# Altium PCB BLDC_PCB.PcbDoc
Units mil, origin at the board's own origin, x right, y up, seen from the top; angles counter-clockwise.
Board outline 6000 x 4000 mil, 2 copper layers (Top Layer, Bottom Layer); 56 components, 25 nets, 275 pads, 0 vias.
Unrouted connection lines stored in the file: 58.
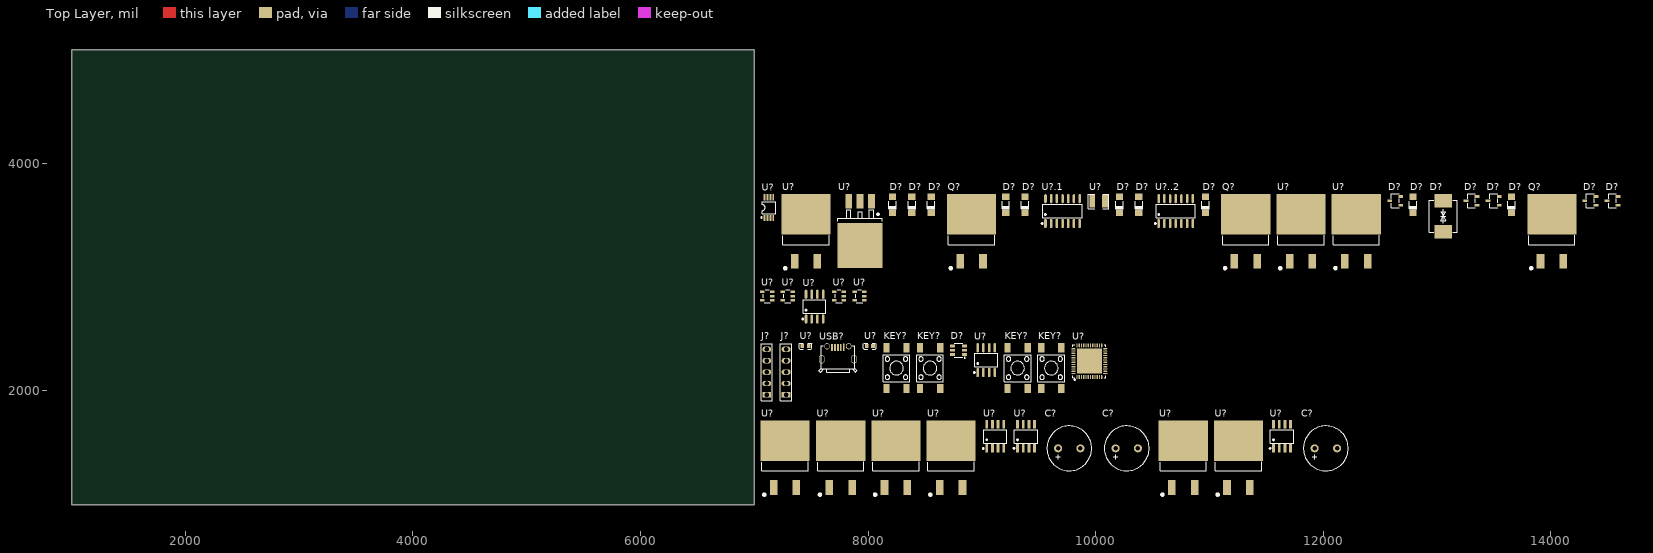
[diagram p0: Top Layer view]
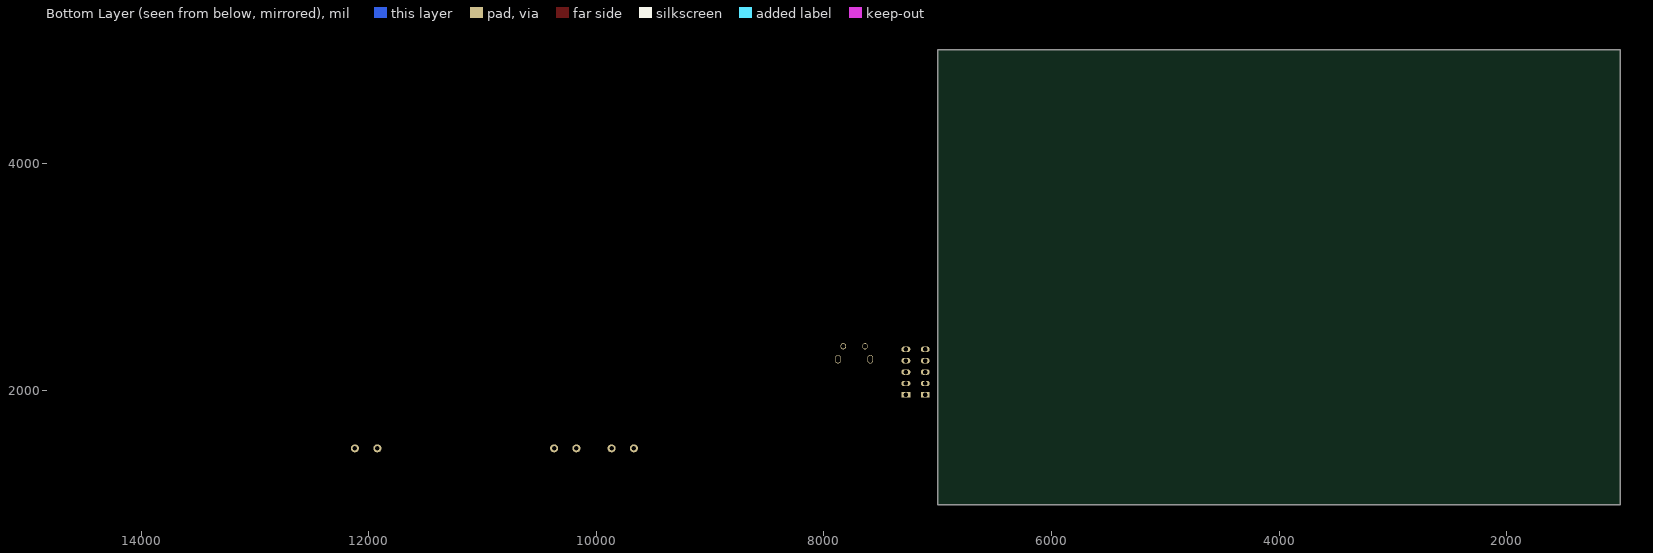
[diagram p1: Bottom Layer view, seen from below]

## Layer stack, top to bottom
Top Solder: solder mask 0.4, Solder Resist, Dk 3.5
Top Layer: signal copper 1.4
Dielectric 1: dielectric 12.6, FR-4, Dk 4.8
Bottom Layer: signal copper 1.4
Bottom Solder: solder mask 0.4, Solder Resist, Dk 3.5

## Board outline
1000,1000 7000,1000 7000,5000 1000,5000

## Design rules (kind name [scope] priority, off if disabled: settings)
Clearance [All] p1: gap=10 ignorepadtopadclearanceinfootprint=FALSE except(0: Arc-Hole Track-Hole SMDPad-Hole THPad-Hole Via-Hole Fill-Hole Poly-Hole Region-Hole Text-Hole)
PolygonConnect [All] p1: connectstyle=Relief reliefconductorwidth=10 reliefentries=4 polygonreliefangle="90 Angle" airgapwidth=10
RoomDefinition PROTECTION [InComponentClass('PROTECTION')] p1: confinementstyle=ConfineIn formatcopy=TRUE lockcomponents=FALSE outline 7045,1060 14625,1060 14625,3840 7045,3840
RoomDefinition POWER [InComponentClass('POWER')] p2: confinementstyle=ConfineIn formatcopy=TRUE lockcomponents=FALSE outline 7045,1060 14625,1060 14625,3840 7045,3840
RoomDefinition MCU [InComponentClass('MCU')] p3: confinementstyle=ConfineIn formatcopy=TRUE lockcomponents=FALSE outline 7045,1060 14625,1060 14625,3840 7045,3840
RoomDefinition DRIVER [InComponentClass('DRIVER')] p4: confinementstyle=ConfineIn formatcopy=TRUE lockcomponents=FALSE outline 7045,1060 14625,1060 14625,3840 7045,3840
RoutingVias [All] p1: holewidth=28 width=50 viastyle="Through Hole" minholewidth=28 minwidth=50 maxholewidth=28 maxwidth=50
SolderMaskExpansion [All] p1: expansion=4
Width [All] p1: maxlimit=10 minlimit=10 preferedwidth=10
30 further rules are at their usual default settings.

## Classes and differential pairs
component class PROTECTION: C? D? Q? R? U? U?.1 U?..2
component class POWER: C? D? L? R? U?
component class MCU: C? D? J? KEY? R? U? USB? Y?
component class DRIVER: C? D? R? U?

## Components (designator, comment, footprint, x,y, rotation, side; value= is the part's Value field where it differs from the comment)
C? "35V 1000uF" "35V 1000uF" 9670,1495 r0 top
C? "35V 1000uF" "35V 1000uF" 10175,1495 r0 top
C? "35V 1000uF" "35V 1000uF" 11925,1495 r0 top
D? "SESRV05-4" SOT-23-6_L2.9-W1.6-P0.95-LS2.8-BR 8795,2355 r0 top
D? "BAT54C" SOT-23-3_L2.9-W1.6-P1.90-LS2.8-BR 12630,3670 r0 top
D? "BAT54C" SOT-23-3_L2.9-W1.6-P1.90-LS2.8-BR 13495,3670 r0 top
D? "BAT54C" SOT-23-3_L2.9-W1.6-P1.90-LS2.8-BR 14540,3670 r0 top
D? "BAT54C" SOT-23-3_L2.9-W1.6-P1.90-LS2.8-BR 13300,3670 r0 top
D? "BAT54C" SOT-23-3_L2.9-W1.6-P1.90-LS2.8-BR 14345,3670 r0 top
D? "BZV55C2V7" SOD-80_L3.5-W1.5-RD 8385,3635 r90 top
D? "BZV55C5V1" SOD-80_L3.5-W1.5-RD 9210,3635 r90 top
D? "BZV55C15" SOD-80_L3.5-W1.5-RD 12790,3635 r90 top
D? "BZV55C15" SOD-80_L3.5-W1.5-RD 13655,3635 r90 top
D? "BZV55C15" SOD-80_L3.5-W1.5-RD 10380,3635 r90 top
D? "BZV55C15" SOD-80_L3.5-W1.5-RD 10210,3635 r90 top
D? "BZV55C15" SOD-80_L3.5-W1.5-RD 9380,3635 r90 top
D? "BZV55C15" SOD-80_L3.5-W1.5-RD 10965,3635 r90 top
D? "BZV55C8V2" SOD-80_L3.5-W1.5-RD 8215,3635 r90 top
D? "BZV55C15" SOD-80_L3.5-W1.5-RD 8555,3635 r90 top
D? "SMCJ24CA-C140805" SMC_L6.9-W5.9-LS7.9-BI 13055,3535 r90 top
J? "HEADER 1X5" 1X5-PIN-HEADER-2.54MM_ES 7280,2165 r90 top
J? "HEADER 1X5" 1X5-PIN-HEADER-2.54MM_ES 7110,2165 r90 top
KEY? "4PINTACTPCBTHTPUSHBUTTON" SW-SMD_4P-L6.0-W6.0-P4.50-LS10.0_TL3301EF160QG 8250,2200 r90 top
KEY? "4PINTACTPCBTHTPUSHBUTTON" SW-SMD_4P-L6.0-W6.0-P4.50-LS10.0_TL3301EF160QG 8545,2200 r90 top
KEY? "4PINTACTPCBTHTPUSHBUTTON" SW-SMD_4P-L6.0-W6.0-P4.50-LS10.0_TL3301EF160QG 9315,2200 r90 top
KEY? "4PINTACTPCBTHTPUSHBUTTON" SW-SMD_4P-L6.0-W6.0-P4.50-LS10.0_TL3301EF160QG 9610,2200 r90 top
Q? "IRF4905" IRF4905 11220,3140 r0 top
Q? "IRF4905" IRF4905 8810,3140 r0 top
Q? "IRF4905" IRF4905 13910,3140 r0 top
U? "IRF3205S" IRF4905 7660,1150 r0 top
U? "IRF3205S" IRF4905 8630,1150 r0 top
U? "IR2103SPBF-IR" SOIC-8_IR2103 9385,1600 r0 top
U? "IRF3205S" IRF4905 7170,1150 r0 top
U? "IRF3205S" IRF4905 8145,1150 r0 top
U? "IR2103SPBF-IR" SOIC-8_IR2103 9115,1600 r0 top
U? "IRF3205S" IRF4905 10670,1150 r0 top
U? "IRF3205S" IRF4905 11155,1150 r0 top
U? "IR2103SPBF-IR" SOIC-8_IR2103 11635,1600 r0 top
U? "100@100MHZ-0603" L0603 8035,2390 r0 top
U? "M24C64-RMN6P" SOIC-8_L4.9-W3.8-P1.27-LS6.0-BL 9035,2270 r0 top
U? "100@100MHZ-0603" L0603 7470,2390 r0 top
U? "STM32F103C8T6" UFQFPN-48_STM32 9945,2255 r0 top
U? "OPA170DBV" SOT-23-5_L2.9-W1.6-P0.95-LS2.8-BR 7115,2830 r0 top
U? "INA180B1IDBVR" SOT-23-5_L2.9-W1.6-P0.95-LS2.8-BR 7925,2830 r0 top
U? "INA180B1IDBVR" SOT-23-5_L2.9-W1.6-P0.95-LS2.8-BR 7295,2830 r0 top
U? "INA180B1IDBVR" SOT-23-5_L2.9-W1.6-P0.95-LS2.8-BR 7745,2830 r0 top
U? "TPS54331DR-YJLTY" SOIC-8_TPS54331 7555,2700 r0 top
U? "MCP6002-XSN" MSOP-8_MCP6002-XSN 7125,3610 r0 top
U? "IRF3205S" IRF4905 11705,3140 r0 top
U? "NTC/10K" R1210 9970,3670 r0 top
U? "IRF3205S" IRF4905 12190,3140 r0 top
U? "IRF3205S" IRF4905 7355,3140 r0 top
U? "LM7809S/TR" TO-263-3_LM7809 7930,3405 r90 top
U?.1 "OPA4170AIDR" SOIC-14_OPA4170 9705,3580 r0 top
U?..2 "OPA4170AIDR _2" SOIC-14_OPA4170 10700,3580 r0 top
USB? "U254-051T-4BHJ25-F2S" MICRO-USB-SMD_U254-051T-4BHJ25-F2S 7735,2290 r0 top

## Footprints (in the part's own frame and the unit in brackets; to place one, negate y for a bottom-side part, rotate by r counter-clockwise, add the part's x,y. Pads: shape width x height; smd on the part's side, far side on the other; paste and mask are expansions set on the pad)
1X5-PIN-HEADER-2.54MM_ES [mm]
  rect 1.2x2 hole 0.9 slot 0.9 at 90 deg paste+0 mask+0.102: 1(-5.08,0)
  oval 1.2x2 hole 0.9 slot 0.9 at 90 deg paste+0 mask+0.102: 2(-2.54,0) 3(0,0) 4(2.54,0) 5(5.08,0)
  silkscreen extent -6.35,-1.27 6.35,1.27
"35V 1000uF" [mm]
  round 1.8 hole 1: 1(0,0) 2(5,0)
  silkscreen extent -2.5,-5 7.5,5, body extent -2.5,-5 7.5,5, height 20
IRF4905 [mm]
  rect 1.7x3.3 smd paste+0 mask+0.051: 1(0,0) 3(5.08,0)
  rect 11x9 smd paste+0 mask+0.051: 2(2.54,10.472)
  silkscreen extent -2.62,-1.81 7.7,5.78, body extent -2.32,-1.18 7.33,14.7, height 4.07
L0603 [mm]
  rect 0.8x0.864 smd paste-100 mask+0.051: 1(-1.182,0.073) 2(0.218,0.073)
  silkscreen extent -1.91,-0.58 0.93,0.74
MICRO-USB-SMD_U254-051T-4BHJ25-F2S [mm]
  rect 0.4x1.6 smd paste-100 mask+0.051: 1(-1.3,2.351) 2(-0.65,2.351) 3(0,2.351) 4(0.65,2.351) 5(1.3,2.359)
  oval 1.2x1.4 hole 0.8 slot 1 at 90 deg paste+0 mask+0.051: 6(2.425,2.601) 7(-2.425,2.601)
  oval 1.2x1.9 hole 0.8 slot 1.5 at 90 deg paste+0 mask+0.051: 8(-3.6,-0.299) 9(3.6,-0.299)
  silkscreen extent -4.23,-3.17 4.23,2.68
MSOP-8_MCP6002-XSN [mil]
  rect 15.98x55 smd paste+0 mask+2: 1(-34.55,-90.56) 2(-8.96,-90.56) 3(16.64,-90.55) 4(42.23,-90.55) 5(42.23,90.55) 6(16.64,90.56) 7(-8.96,90.55) 8(-34.55,90.55)
  silkscreen extent -66,-91 63,51
R1210 [mil]
  rect 50.49x110.55 smd paste-3937.01 mask+2: 1(-0.24,-4.45) 2(113.25,-4.45)
  silkscreen extent -34,-69 147,60
SMC_L6.9-W5.9-LS7.9-BI [mm]
  rect 3.03x3.82 smd paste+0 mask+0.051: 1(-3.435,0) 2(3.435,0)
  silkscreen extent -3.6,-3.11 3.6,3.11
SOD-80_L3.5-W1.5-RD [mm]
  rect 1.44x1.62 smd paste+0 mask+0.051: 1(-1.765,0) 2(1.765,0)
  silkscreen extent -0.84,-0.83 0.84,0.83
SOIC-8_IR2103 [mm]
  rect 0.63x1.865 smd paste+0 mask+0.051: 1(-1.82,-2.682) 2(-0.55,-2.682) 3(0.72,-2.682) 4(1.99,-2.682) 5(1.99,2.682) 6(0.72,2.682) 7(-0.55,2.682) 8(-1.82,2.682)
  silkscreen extent -2.74,-2.83 2.66,1.52
SOIC-8_L4.9-W3.8-P1.27-LS6.0-BL [mm]
  oval 0.588x2.045 smd paste+0 mask+0.051: 1(-1.805,-2.773) 2(-0.535,-2.773) 3(0.735,-2.773) 4(2.005,-2.773) 5(2.005,2.773) 6(0.735,2.773) 7(-0.535,2.773) 8(-1.805,2.773)
  silkscreen extent -2.7,-2.92 2.63,1.52
SOIC-8_TPS54331 [mm]
  oval 0.588x2.045 smd paste+0 mask+0.051: 1(-2.535,-1.748) 2(-1.265,-1.748) 3(0.005,-1.748) 4(1.275,-1.748) 5(1.275,3.797) 6(0.005,3.797) 7(-1.265,3.797) 8(-2.535,3.797)
  silkscreen extent -3.43,-1.9 1.9,2.55
SOIC-14_OPA4170 [mil]
  oval 22.6x80.24 smd paste+0 mask+2: 1(-145.63,-109.02) 2(-95.63,-109.02) 3(-45.63,-109.02) 4(4.37,-109.02) 5(54.37,-109.02) 6(104.37,-109.02) 7(154.37,-109.02) 8(154.37,109.02) 9(104.37,109.02) 10(54.37,109.02) 11(4.37,109.02) 12(-45.63,109.02) 13(-95.63,109.02) 14(-145.63,109.02)
  silkscreen extent -181,-115 178,60
SOT-23-3_L2.9-W1.6-P1.90-LS2.8-BR [mm]
  rect 1.07x0.6 smd paste+0 mask+0.051: 1(1.314,-0.95) 2(1.314,0.95) 3(-1.156,0)
  silkscreen extent -0.8,-1.54 0.96,1.54
SOT-23-5_L2.9-W1.6-P0.95-LS2.8-BR [mm]
  rect 1x0.6 smd paste+0 mask+0.05: 1(1.1,-0.886) 2(1.1,0.064) 3(1.1,1.013) 4(-1.1,1.014) 5(-1.1,-0.886)
  silkscreen extent -0.89,-1.46 0.7,1.46
SOT-23-6_L2.9-W1.6-P0.95-LS2.8-BR [mm]
  rect 1.1x0.6 smd paste+0 mask+0.051: 1(1.35,-0.899) 2(1.35,0.051) 3(1.35,1.001) 4(-1.35,1.001) 5(-1.35,0.051) 6(-1.35,-0.899)
  silkscreen extent -0.9,-1.73 1.52,1.6
SW-SMD_4P-L6.0-W6.0-P4.50-LS10.0_TL3301EF160QG [mm]
  rect 2.1x1.4 smd paste+0 mask+0.051: 1(-4.55,2.25) 2(4.55,2.25) 3(-4.55,-2.25) 4(4.55,-2.25)
  silkscreen extent -3,-3 3,3
TO-263-3_LM7809 [mm]
  rect 3.3x1.511 smd paste+0 mask+0.051: 1(6.632,-2.54) 2(6.632,0) 3(6.632,2.54)
  rect 10.02x10.122 smd paste+0 mask+0.051: 4(-3.272,0)
  silkscreen extent 2.14,-5 4.74,5
UFQFPN-48_STM32 [mm]
  oval 0.28x0.9 smd paste-100 mask+0.051: 1(-2.751,-3.396) 2(-2.25,-3.396) 3(-1.75,-3.396) 4(-1.25,-3.396) 5(-0.749,-3.396) 6(-0.249,-3.396) 7(0.249,-3.396) 8(0.749,-3.396) 9(1.25,-3.396) 10(1.75,-3.396) 11(2.25,-3.396) 12(2.751,-3.396) 25(2.751,3.698) 26(2.25,3.698) 27(1.75,3.698) 28(1.25,3.698) 29(0.749,3.698) 30(0.249,3.698) 31(-0.249,3.698) 32(-0.749,3.698) 33(-1.25,3.698) 34(-1.75,3.698) 35(-2.25,3.698) 36(-2.751,3.698)
  oval 0.9x0.28 smd paste-100 mask+0.051: 13(3.547,-2.599) 14(3.547,-2.099) 15(3.547,-1.599) 16(3.547,-1.099) 17(3.547,-0.599) 18(3.547,-0.099) 19(3.547,0.401) 20(3.547,0.901) 21(3.547,1.401) 22(3.547,1.901) 23(3.547,2.401) 24(3.547,2.901) 37(-3.547,2.902) 38(-3.547,2.402) 39(-3.547,1.901) 40(-3.547,1.401) 41(-3.547,0.901) 42(-3.547,0.4) 43(-3.547,-0.098) 44(-3.547,-0.598) 45(-3.547,-1.098) 46(-3.547,-1.599) 47(-3.547,-2.099) 48(-3.547,-2.6)
  rect 5.6x5.6 smd paste-100 mask+0.051: 49(0,0.151)
  silkscreen extent -3.7,-4.15 3.7,3.85

## Part data
J? J?: library part "HEADER 1X5 COPY"

## Nets (pads, with @x,y where several pads share a name; then routed paths per layer and width w, separated by ;. In a path a pad name is that pad's centre, name@x,y a point inside that pad or via, vN(x,y) a via of type N, cw(c..) or ccw(c..) an arc to the next point about the centre after c; other vN are vias at no path point)
3.3V: U?.1@9043.35,1494.39 U?.1@9313.35,1494.39 U?.1@11563.35,1494.39
GND: C?.2@10371.85,1495 C?.2@12121.85,1495 J?.2@7110,2065 J?.5@7280,2365 KEY?.2@9521.42,2379.13 KEY?.4@9698.58,2379.13 U?.1.11 U?.1@8963.92,2160.85 U?.2@7116.04,3519.44 U?.2@7158.31,2832.5 U?.2@7338.31,2832.5 U?.2@7760,1562.28 U?.2@7788.31,2832.5 U?.2@7930,3666.1 U?.2@7968.31,2832.5 U?.2@9013.92,2160.85 U?.3@7338.31,2869.9 U?.3@7788.31,2869.9 U?.3@7968.31,2869.9 U?.3@9063.92,2160.85 U?.4@7930,3276.19 U?.4@9113.92,2160.85 U?.4@9193.35,1494.39 U?.4@9463.35,1494.39 U?.4@11713.35,1494.39 U?.7@7505.21,2849.5 U?.7@9013.92,2379.15 U?.8@9974.5,2121.29 U?.23 U?.35 U?.47 U?..2.11 USB?.5
NetC?_1: D?.2@13351.74,3707.4 U?.3@7860,1150 U?.13
NetC?_2: C?.2@9866.85,1495 D?.1@8848.15,2319.59 D?.2@8848.15,2356.99 U?.2@7270,1562.28 U?.3@8345,1150 U?.6@9143.35,1705.61
NetD?_1: D?.1@13351.74,3632.6 U?.12
NetD?_2: D?.2@14396.74,3707.4 U?.1@7660,1150 U?.11
NetD?_3: D?.3@8848.15,2394.39 U?.33 USB?.3
NetJ?_1: J?.1@7280,1965 U?.22
NetJ?_2: J?.2@7280,2065 U?.21
NetJ?_3: J?.3@7110,2165 U?.34
NetJ?_4: J?.4@7110,2265 U?.37
NetJ?_5: J?.5@7110,2365 U?.39
NetKEY?_1: KEY?.1@8161.42,2020.87 KEY?.3@8338.58,2020.87 U?.27
NetR?_1: U?.5@11713.35,1705.61
NetR?_2: U?.1@10670,1150
NetU?_1: U?.1@8030,3666.1 U?.2@11805,3552.28
NetU?_2: U?.2@11613.35,1494.39 U?.29
NetU?_3: U?.3@11663.35,1494.39 U?.38
NetU?_4: U?.4@9895.8,2121.29
NetU?_5: U?.5@9915.5,2121.29
NetU?_6: U?.6@9935.2,2121.29
NetU?_7: U?.7@9954.8,2121.29
NetU?_15: U?.15
NetU?_16: U?.16
NRST: C?.1@9670,1495 KEY?.1@9521.42,2020.87 KEY?.3@9698.58,2020.87
pads on no net: C?.1@10175,1495 C?.1@11925,1495 D?.1@8215,3565.51 D?.1@8385,3565.51 D?.1@8555,3565.51 D?.1@9210,3565.51 D?.1@9380,3565.51 D?.1@10210,3565.51 D?.1@10380,3565.51 D?.1@10965,3565.51 D?.1@12681.74,3632.6 D?.1@12790,3565.51 D?.1@13055,3399.76 D?.1@13546.74,3632.6 D?.1@13655,3565.51 D?.1@14396.74,3632.6 D?.1@14591.74,3632.6 D?.2@8215,3704.49 D?.2@8385,3704.49 D?.2@8555,3704.49 D?.2@9210,3704.49 D?.2@9380,3704.49 D?.2@10210,3704.49 D?.2@10380,3704.49 D?.2@10965,3704.49 D?.2@12681.74,3707.4 D?.2@12790,3704.49 D?.2@13055,3670.24 D?.2@13546.74,3707.4 D?.2@13655,3704.49 D?.2@14591.74,3707.4 D?.3@12584.49,3670 D?.3@13254.49,3670 D?.3@13449.49,3670 D?.3@14299.49,3670 D?.3@14494.49,3670 D?.4 D?.5 D?.6 J?.1@7110,1965 J?.3@7280,2165 J?.4@7280,2265 KEY?.1@8456.42,2020.87 KEY?.1@9226.42,2020.87 KEY?.2@8161.42,2379.13 KEY?.2@8456.42,2379.13 KEY?.2@9226.42,2379.13 KEY?.3@8633.58,2020.87 KEY?.3@9403.58,2020.87 KEY?.4@8338.58,2379.13 KEY?.4@8633.58,2379.13 KEY?.4@9403.58,2379.13 Q?.1 Q?.2 Q?.3 U?.1.1 U?.1.2 U?.1.3 U?.1.4 U?.1.5 U?.1.6 U?.1.7 U?.1.8 U?.1.9 U?.1.10 U?.1.12 U?.1.13 U?.1.14 U?.1@7090.45,3519.44 U?.1@7158.31,2795.1 U?.1@7170,1150 U?.1@7338.31,2795.1 U?.1@7355,3140 U?.1@7423.47,2392.88 U?.1@7455.21,2631.2 U?.1@7788.31,2795.1 U?.1@7968.31,2795.1 U?.1@7988.47,2392.88 U?.1@8145,1150 U?.1@8630,1150 U?.1@9836.7,2121.29 U?.1@9969.76,3665.55 U?.1@11155,1150 U?.1@11705,3140 U?.1@12190,3140 U?.2@7455,3552.28 U?.2@7478.58,2392.88 U?.2@7505.21,2631.2 U?.2@8043.58,2392.88 U?.2@8245,1562.28 U?.2@8730,1562.28 U?.2@9093.35,1494.39 U?.2@9363.35,1494.39 U?.2@9856.4,2121.29 U?.2@10083.25,3665.55 U?.2@10770,1562.28 U?.2@11255,1562.28 U?.2@12290,3552.28 U?.3@7141.64,3519.45 U?.3@7158.31,2869.9 U?.3@7370,1150 U?.3@7555,3140 U?.3@7555.21,2631.2 U?.3@7830,3666.1 U?.3@8830,1150 U?.3@9143.35,1494.39 U?.3@9413.35,1494.39 U?.3@9876.1,2121.29 U?.3@10870,1150 U?.3@11355,1150 U?.3@11905,3140 U?.3@12390,3140 U?.4@7071.69,2869.9 U?.4@7167.23,3519.45 U?.4@7251.69,2869.9 U?.4@7605.21,2631.2 U?.4@7701.69,2869.9 U?.4@7881.69,2869.9 U?.5@7071.69,2795.1 U?.5@7167.23,3700.55 U?.5@7251.69,2795.1 U?.5@7605.21,2849.5 U?.5@7701.69,2795.1 U?.5@7881.69,2795.1 U?.5@9113.92,2379.15 U?.5@9193.35,1705.61 U?.5@9463.35,1705.61 U?.6@7141.64,3700.56 U?.6@7555.21,2849.5 U?.6@9063.92,2379.15 U?.6@9413.35,1705.61 U?.6@11663.35,1705.61 U?.7@7116.04,3700.55 U?.7@9093.35,1705.61 U?.7@9363.35,1705.61 U?.7@11613.35,1705.61 U?.8@7090.45,3700.55 U?.8@7455.21,2849.5 U?.8@8963.92,2379.15 U?.8@9043.35,1705.61 U?.8@9313.35,1705.61 U?.8@11563.35,1705.61 U?.9 U?.10 U?.14 U?.17 U?.18 U?.19 U?.20 U?.24 U?.25 U?.26 U?.28 U?.30 U?.31 U?.32 U?.36 U?.40 U?.41 U?.42 U?.43 U?.44 U?.45 U?.46 U?.48 U?.49 U?..2.1 U?..2.2 U?..2.3 U?..2.4 U?..2.5 U?..2.6 U?..2.7 U?..2.8 U?..2.9 U?..2.10 U?..2.12 U?..2.13 U?..2.14 USB?.1 USB?.2 USB?.4 USB?.6 USB?.7 USB?.8 USB?.9